# Altium PCB JTAG-ADAPTOR.PcbDoc
Units mm, origin at the board's own origin, x right, y up, seen from the top; angles counter-clockwise.
Board outline 35 x 18 mm, 2 copper layers (Top Layer, Bottom Layer); 4 components, 9 nets, 30 pads, 8 vias.
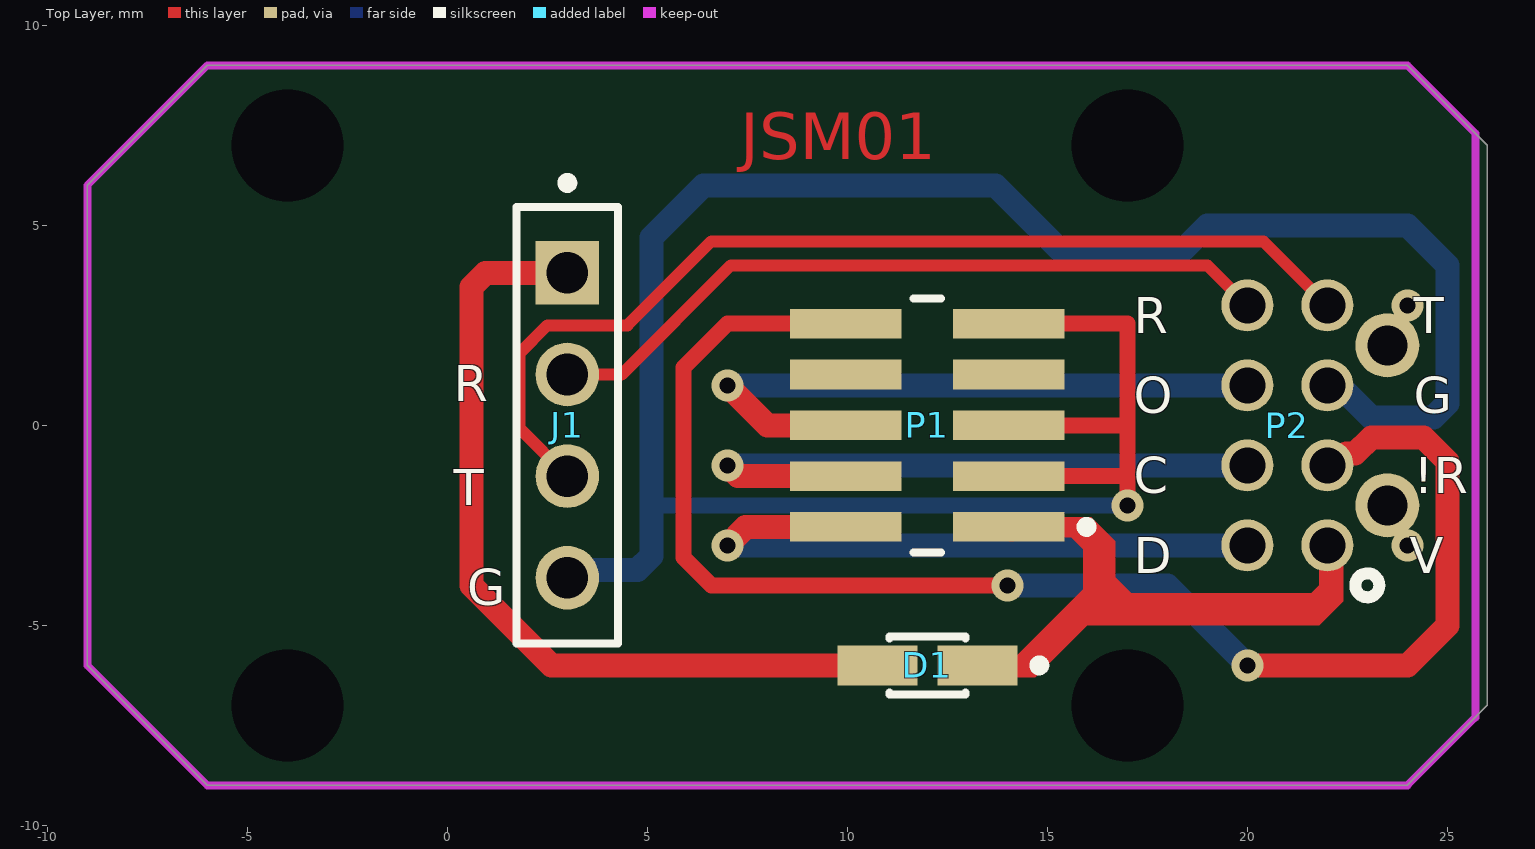
[diagram p0: Top Layer view]
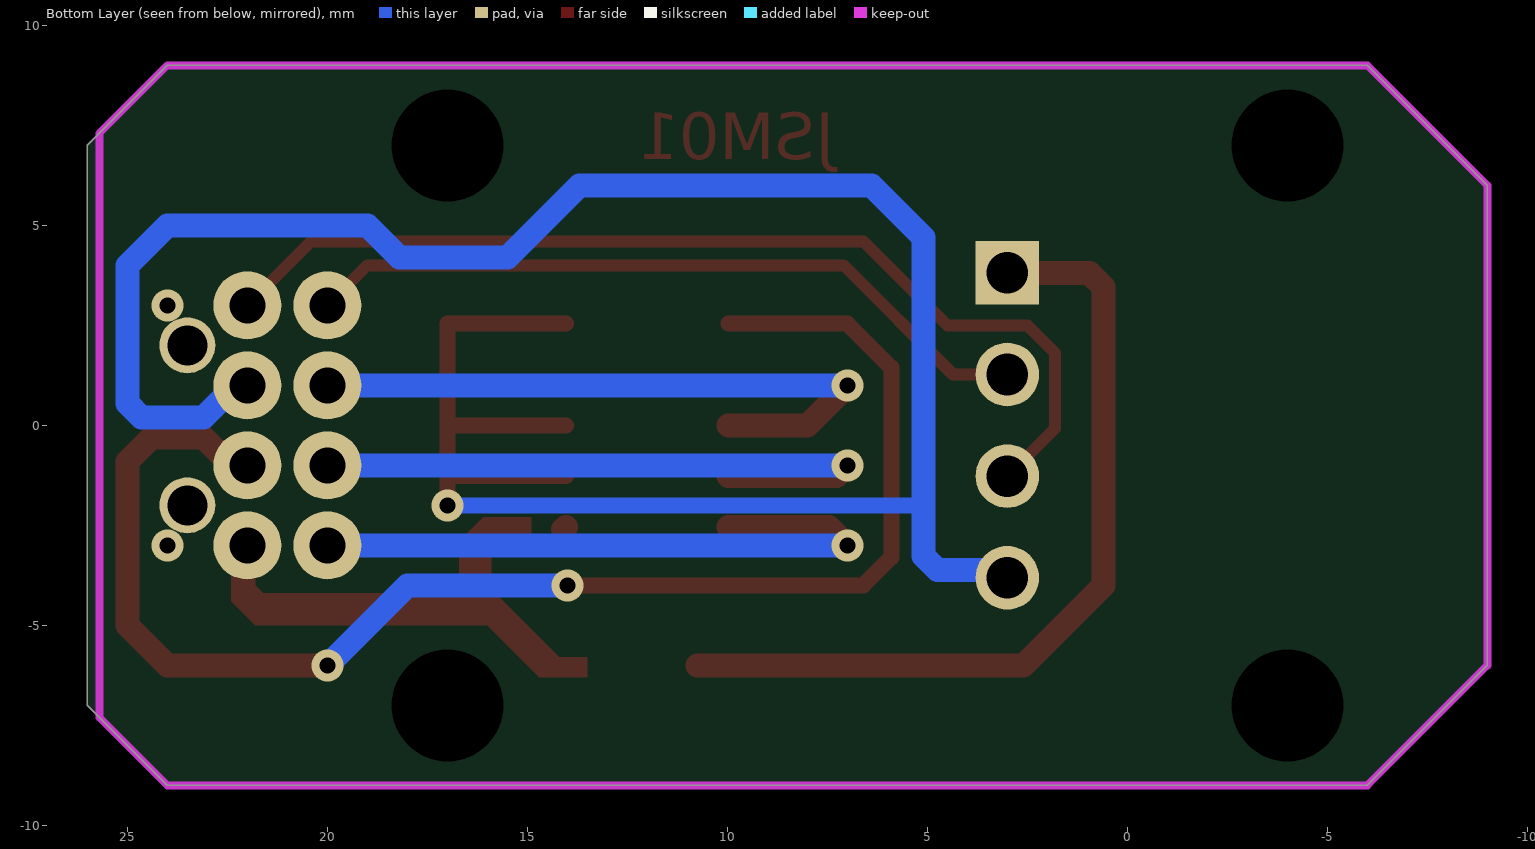
[diagram p1: Bottom Layer view, seen from below]
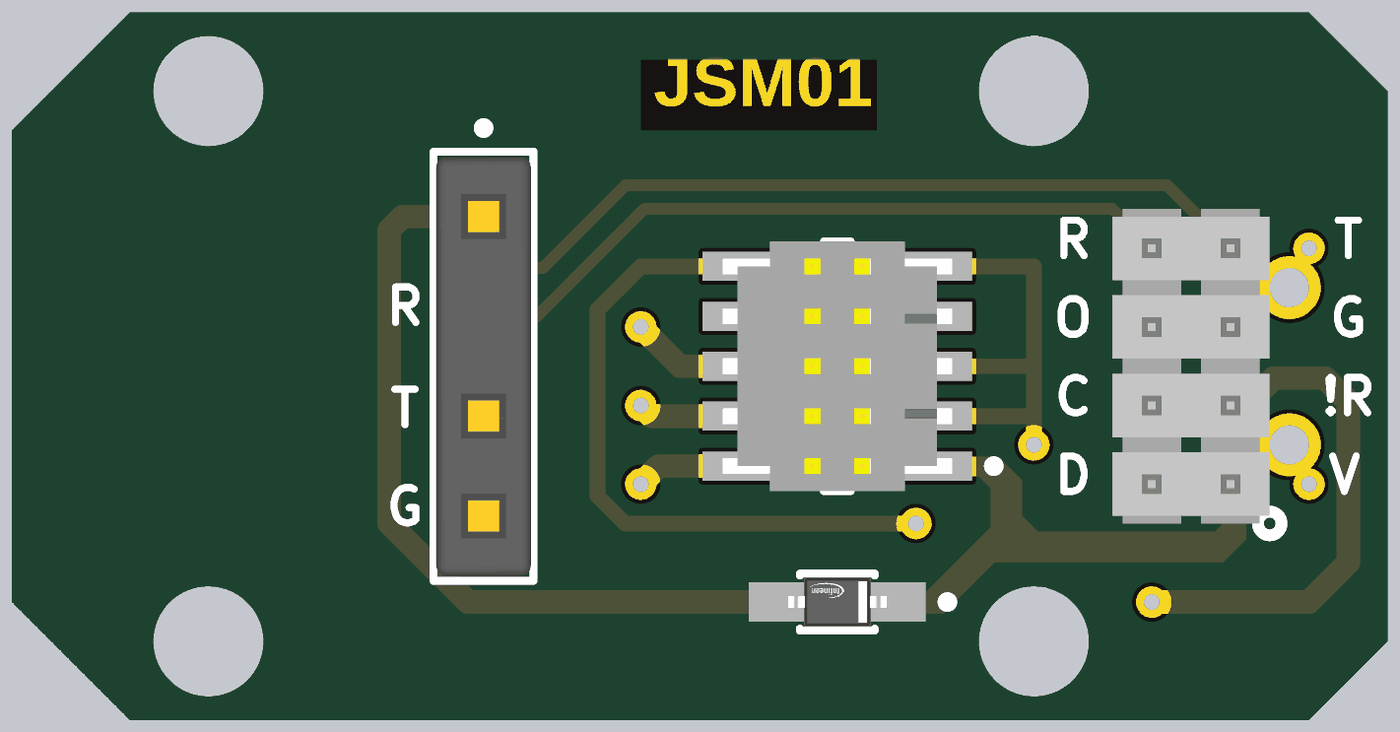
[diagram p2: 3D render of the assembled board from above, using the file's embedded part models]

## Layer stack, top to bottom
Top Solder: solder mask 0.0102, Solder Resist, Dk 3.5
Top Layer: signal copper 0.0356
Dielectric 1: dielectric 0.32, FR-4, Dk 4.8
Bottom Layer: signal copper 0.0356
Bottom Solder: solder mask 0.0102, Solder Resist, Dk 3.5

## Board outline
-6,-9 -9,-6 -9,6 -6,9 24,9 26,7 26,-7 24,-9

## Design rules (kind name [scope] priority, off if disabled: settings)
Clearance [All] p1: gap=0.25 ignorepadtopadclearanceinfootprint=FALSE
PolygonConnect [All] p1: connectstyle=Relief reliefconductorwidth=0.254 reliefentries=4 polygonreliefangle="90 Angle" airgapwidth=0.254
RoutingVias [All] p1: holewidth=0.4 width=0.8 viastyle="Through Hole" minholewidth=0.4 minwidth=0.8 maxholewidth=0.8 maxwidth=1.27
SolderMaskExpansion [All] p1: expansion=0.102 istentingtop=FALSE
Width [All] p1: maxlimit=0.6 minlimit=0.3 preferedwidth=0.4
30 further rules are at their usual default settings.

## Components (designator, comment, footprint, x,y, rotation, side; value= is the part's Value field where it differs from the comment)
D1 "BAS140WE6327HTSA1" FP-PG-SOD323-2-MFG 12,-6 r180 top
J1 "SSW-104-01-G-S-002" FP-SSW-104-01-G-S-002-MFG 3,0 r270 top
P1 "FTSH-105-01-L-DV-K-TR" SMTC-FTSH-105-01-L-DV-K_V 12,0 r90 top
P2 "MTMM-104-06-T-D-250" SMTC-MTMM-104-06-X-D-250 22,-3 r90 top

## Footprints (in the part's own frame and the unit in brackets; to place one, negate y for a bottom-side part, rotate by r counter-clockwise, add the part's x,y. Pads: shape width x height; smd on the part's side, far side on the other; paste and mask are expansions set on the pad)
FP-PG-SOD323-2-MFG [mm]
  rect 2x1 smd paste+0 mask+0: 1(-1.25,0) 2(1.25,0)
  silkscreen extent -2.93,-0.72 0.95,0.72, body extent -1.75,-0.82 1.75,0.82, height 0.25
FP-SSW-104-01-G-S-002-MFG [mm]
  rect 1.59x1.59 hole 1.04 paste-1000 mask+0: 1(-3.81,0)
  round 1.59 hole 1.04 paste-1000 mask+0: 2(-1.27,0) 3(1.27,0) 4(3.81,0)
  silkscreen extent -6.18,-1.27 5.46,1.27, body extent -5.56,-1.37 5.56,1.37, height 0.25
SMTC-FTSH-105-01-L-DV-K_V [mm] "CONN, 10-Leads, Body 6.35x3.43mm, Pitch 1.27mm"
  rect 0.74x2.79 smd: 1(-2.54,-2.035) 2(-2.54,2.035) 3(-1.27,-2.035) 4(-1.27,2.035) 5(0,-2.035) 6(0,2.035) 7(1.27,-2.035) 8(1.27,2.035) 9(2.54,-2.035) 10(2.54,2.035)
  silkscreen extent -3.17,-4.11 3.17,0.34, body extent -3.17,-2.92 3.18,2.92, height 6.12
SMTC-MTMM-104-06-X-D-250 [mm] "Terminal Strip Assembly, 2x4 Pins, Vertical, 2mm Pitch, Male"
  round 1.3 / inner rect 1.4x1.4 / far side round 1.7 hole 0.9: 1(0,0)
  round 1.3 / inner round 1.4 / far side round 1.7 hole 0.9: 2(0,2) 3(2,0) 4(2,2) 5(4,0) 6(4,2) 7(6,0) 8(6,2)
  body extent -1,-1 7,3, height 7.85

## Part data
D1: library part CMP-32890-000002-1, "DIODE SCHOTTKY 40V 120MA SOD323", Average Rectified Current=120mA, Case/Package=SOD-323-2, Forward Voltage=1V, Max Operating Temperature=125°C, Max Repetitive Reverse Voltage (Vrrm)=40V, Min Operating Temperature=-55°C, Peak Non-Repetitive Surge Current=200mA, Element Configuration=Single, Forward Current=120mA, Halogen Free="Not Halogen Free", Lead Free="Lead Free", Max Reverse Voltage (DC)=40V, Mount="Surface Mount", Number of Pins=2, Packaging="Tape and Reel", Radiation Hardening=No, Reverse Recovery Time=100ps
J1: library part CMP-02766-000071-1, "CONN RCPT 4POS 0.1 GOLD PCB", Current Rating=4.7A, Manufacturer=Samtec, Package=HDR4, Temperature="-55°C to +125°C", Temperature Range High=+125°C, Temperature Range Low=-55°C, Voltage Rating=655V, Automotive=No, Category=Conn, ComponentLink2Description=Datasheet, ComponentLink2URL=http://suddendocs.samtec.com/catalog_english/ssw_th.pdf, Conn Gender=Female, Conn Orientation=Vertical, Contact Material=Gold,Nickel, Device Class L1=Connectors, Device Class L2="Headers and Wire Housings", Device Class L3=unset, Digikey Description="CONN RCPT 4POS 0.1 GOLD PCB", Footprint Url=http://suddendocs.samtec.com/prints/ssw-s.pdf, Height=8.64mm, Is Female=yes, Lead Free=Yes, Manufacturer Part Number=SSW-104-01-G-S-002, Number of Contacts=4, Number of Rows=1, Octopart=https://octopart.com/ssw-104-01-g-s-002-samtec-17347181, Pitch=2.54mm, RoHS=TRUE
P1: library part CMP-2000-06293-1, "Male Header, Pitch 1.27 mm, 2 x 5 Position, Height 6.12 mm, -55 to 125 degC, RoHS, Tape and Reel", Manufacturer=SamtecInc., Package Description="Male Header, Pitch 1.27 mm, 2 x 5 Position, Height 5.97 mm, Tail Length 4.32 mm", Package Reference=FTSH-105-01-L-DV-K, Category=ConnectorHeadersandPCBReceptacles, Contact Plating=GoldOverNickel, Datasheet URL=https://ciiva.com/datasheet-click-20089621?src=ciiva&sig=740d15a9, Datasheet Version=09/2015, Gender=HDR, Manufacturer URL=http://www.samtec.com/, Mounting Technology=SurfaceMount, Number of Contacts=10, Number of Rows=2, Package URL=http://suddendocs.samtec.com/prints/ftsh-1xx-xx-xxx-dv-xxx-footprint.pdf, Pitch=1.27mm, Rad Hard=No, Termination Method=Solder, Type=UnshroudedHeader
P2: library part CMP-1029-00105-1, "Modified Through-Hole Header, Vertical, -55 to 105 degC, 2 mm Pitch, 8-Pin, Male, RoHS", Manufacturer=Samtec, Temperature Range="-55 to 105 degC", ComponentLink1Description="Manufacturer URL", ComponentLink1URL=http://www.samtec.com, ComponentLink2Description=Datasheet, ComponentLink2URL=http://d2a072wq521u33.cloudfront.net/catalog_english//MTMM_TH.PDF, ComponentLink3Description="Package Specification", ComponentLink3URL=http://www.samtec.com/documents/webfiles/cpdf/MTMM-1XX-XX-XX-X-XXX-XX-XXX-MKT.pdf, DatasheetVersion=F-214, Mounting Technology=Through-hole, Orientation=Vertical, PackageDescription="2mm Terminal Strip Assembly", PackageReference=MTMM-104-06-X-D-250, PackageVersion="AE, 12/1993", PartNumber=MTMM-104-06-T-D-250, Pitch="2 mm", RoHS=True

## Free pads (board coordinates)
  round 1.6 / inner round 1 / far side round 1.4 hole 1: 2(23.5,-2) 2(23.5,2)
  round 1.524 hole 2.8 unplated: 3(-4,-7) 3(-4,7) 3(17,-7) 3(17,7)

## Via types
v1: diameter 0.8, hole 0.4, Top Layer to Bottom Layer, 8 vias

## Nets (pads, with @x,y where several pads share a name; then routed paths per layer and width w, separated by ;. In a path a pad name is that pad's centre, name@x,y a point inside that pad or via, vN(x,y) a via of type N, cw(c..) or ccw(c..) an arc to the next point about the centre after c; other vN are vias at no path point)
GND: J1.4 P1.3 P1.5 P1.9 P2.5 | length 64.6
  Top Layer w0.4: P1.3 17,-1.27 ; P1.5 17,0 ; P1.9 17,2.54 17,0 ; v1(17,-2) 17,-1.27 ; 17,-1.27 17,0
  Bottom Layer w0.4: J1.4 J1.4@3.189,-3.621 ; 5,-2 v1(17,-2)
  Bottom Layer w0.6: J1.4@3.189,-3.621 4.749,-3.621 5.1,-3.269 5.1,-2 5.1,4.7 6.4,6 13.7,6 15.5,4.2 18.2,4.2 19,5 24,5 25,4 25,0.551 24.649,0.2 23.098,0.2 22.298,1 P2.5
NetD1_2: D1.2 J1.1 | length 21
  Top Layer w0.6: J1.1 0.951,3.81 0.6,3.459 0.6,-4 2.6,-6 D1.2
uRESET: P1.10 P2.3 | length 37.5
  Top Layer w0.4: P1.10 7,2.54 5.9,1.44 5.9,-3.3 6.6,-4 v1(14,-4)
  Top Layer w0.6: v1(20,-6) 24,-6 25,-5 25,-0.9 24.4,-0.3 23.1,-0.3 22.696,-0.704 22.485,-0.704 22.189,-1 P2.3
  Bottom Layer w0.6: v1(14,-4) 18,-4 v1(20,-6)
uRX: J1.2 P2.8 | length 18.5
  Top Layer w0.3: J1.2 4.36,1.27 7.09,4 19,4 P2.8
uSWCLK: P1.4 P2.4 | length 16.1
  Top Layer w0.6: v1(7,-1) 7.27,-1.27 P1.4
  Bottom Layer w0.6: v1(7,-1) P2.4
uSWDIO: P1.2 P2.2 | length 16.2
  Top Layer w0.6: v1(7,-3) 7.46,-2.54 P1.2
  Bottom Layer w0.6: v1(7,-3) P2.2
uSWO: P1.6 P2.6 | length 16.4
  Top Layer w0.6: v1(7,1) 8,0 P1.6
  Bottom Layer w0.6: v1(7,1) P2.6
uTX: J1.3 P2.7 | length 25.6
  Top Layer w0.3: J1.3 1.805,-0.075 1.805,1.805 2.5,2.5 4.5,2.5 6.6,4.6 20.4,4.6 P2.7
VDD: D1.1 P1.1 P2.1 | length 0.1
  Top Layer w0.6: P1.1 P1.1@14.105,-2.61
pads on no net: P1.7 P1.8
copper on no net:
  other v1: 24,-3 24,3

## Keep-outs
Keep-Out Layer:
  lines w0.2: -9,-6 -6,-9 24,-9 25.7,-7.3 25.7,7.3 24,9 -6,9 -9,6 -9,-6

## Other copper
Top Layer:
  region net VDD: 14.9,-2.3 16.1,-2.3 16.697,-2.897 16.7,-3.8 17.1,-4.2 21.6,-4.2 21.8,-4 21.8,-3 22.4,-3 22.4,-4.4 21.8,-5 16,-5 14.7,-6.3 13.5,-6.3 13.5,-5.8 14.2,-5.8 15.9,-4.1 15.9,-3.1 15.6,-2.8 14.9,-2.8
  text "JSM01" at 7.324,6.259 h2

## Silkscreen, mask and mechanical layers (free items; w line width, h text height)
Top Overlay:
  circle w0.3: c23,-4 r0.3
  text "R" at 17.167,2.3 h0.9
  text "T" at 24.167,2.3 h0.9
  text "R" at 0.167,0.6 h0.9
  text "O" at 17.167,0.3 h0.9
  text "G" at 24.167,0.3 h0.9
  text "C" at 17.167,-1.7 h0.9
  text "!R" at 24.167,-1.7 h0.9
  text "T" at 0.167,-2 h0.9
  text "D" at 17.167,-3.7 h0.9
  text "V" at 24.067,-3.7 h0.9
  text "G" at 0.499,-4.5 h0.9
Top Solder:
  rectangle: 7,6 13,7.8
Bottom Solder:
  rectangle: 19,-4 23,4